# Altium PCB BUSBAR_18650_12S.PcbDoc (part 2 of 2)
Units mm, origin at the board's own origin, x right, y up, seen from the top; angles counter-clockwise.
Board outline 250.7 x 47.4 mm, 2 copper layers (Top Layer, Bottom Layer), stack 1.571 mm thick; 467 components, 25 nets, 999 pads, 401 vias.
Unrouted connection lines stored in the file: 23.
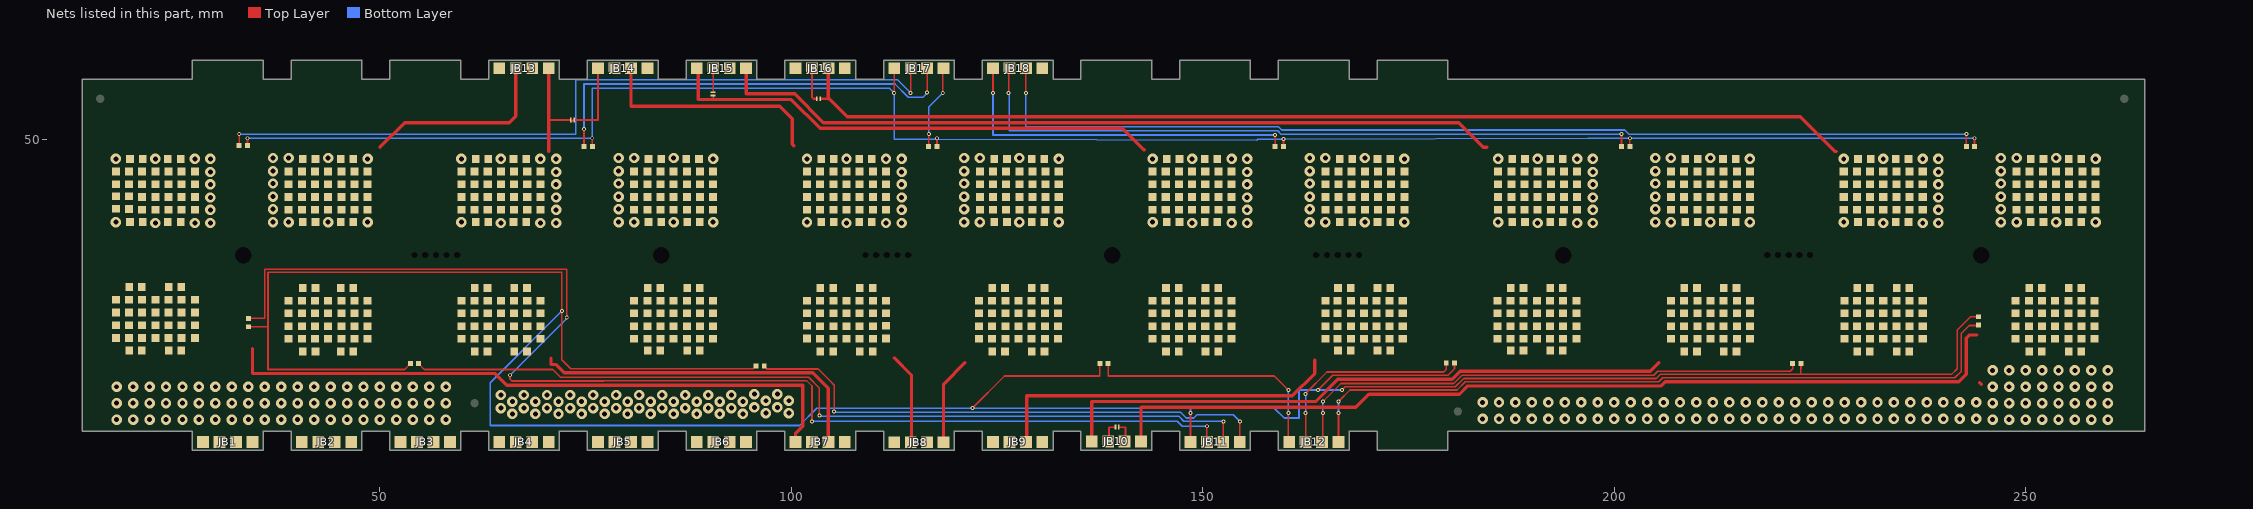
[diagram p2: the nets of this part, all layers, seen from the top]

## Part data
JB1 JB2 JB3 JB4 JB5 JB6 JB7 JB8 JB9 JB10 JB11 JB12 JB13 JB14 JB15 JB16 JB17 JB18: "Battery Spring x4"
NT_3_4 NT_8_9 NT_13_14 NT_13_14_2: library part NET_TIE, "R - Net Tie"
RC_0 RC_1 RC_2 RC_3 RC_4 RC_5 RC_6 RC_7 RC_8 RC_9 RC_10 RC_11 RC_12 RC_13 RC_14 RC_15 RC_16 RC_17 RC_18 RC_19 RC_20 RC_21 RC_22 RC_23 RC_24 RC_25 RC_26 RC_27 RC_28 RC_29 RC_30 RC_31 RC_32 RC_33 RC_34 RC_35 RC_36 RC_37 RC_38 RC_39 RC_40 RC_41 RC_42 RC_43 RC_44 RC_45 RC_46 RC_47 RC_48 RC_49 RC_50 RC_51 RC_52 RC_53 RC_54 RC_55 RC_56 RC_57 RC_58 RC_59 RC_60 RC_61 RC_62 RC_63 RC_64 RC_65 RC_66 RC_67 RC_68 RC_69 RC_70 RC_71 RC_72 RC_73 RC_74 RC_75 RC_76 RC_77 RC_78 RC_79 RC_80 RC_81 RC_82 RC_83 RC_84 RC_85 RC_86 RC_87 RC_88 RC_89 RC_90 RC_91 RC_92 RC_93 RC_94 RC_95 RC_96 RC_97 RC_98 RC_99 RC_100 RC_101 RC_102 RC_103 RC_104 RC_105 RC_106 RC_107 RC_108 RC_109 RC_110 RC_111 RC_112 RC_113 RC_114 RC_115 RC_116 RC_117 RC_118 RC_119 RC_120 RC_121 RC_122 RC_123 RC_124 RC_125 RC_126 RC_127 RC_128 RC_129 RC_130 RC_131 RC_132 RC_133 RC_134 RC_135 RC_136 RC_137 RC_138 RC_139 RC_140 RC_141 RC_142 RC_143 RC_144 RC_145 RC_146 RC_147 RC_148 RC_149 RC_150 RC_151 RC_152 RC_153 RC_154 RC_155 RC_156 RC_157 RC_158 RC_159 RC_160 RC_161 RC_162 RC_163 RC_164 RC_165 RC_166 RC_167 RC_168 RC_169 RC_170 RC_171 RC_172 RC_173 RC_174 RC_175 RC_176 RC_177 RC_178 RC_179 RC_180 RC_181 RC_182 RC_183 RC_184 RC_185 RC_186 RC_187 RC_188 RC_189 RC_190 RC_191 RC_192 RC_193 RC_194 RC_195 RC_196 RC_197 RC_198 RC_199 RC_200 RC_201 RC_202 RC_203 RC_204 RC_205 RC_206 RC_207 RC_208 RC_209 RC_210 RC_211 RC_212 RC_213 RC_214 RC_215 RC_216 RC_217 RC_218 RC_219 RC_220 RC_221 RC_222 RC_223 RC_224 RC_225 RC_226 RC_227 RC_228 RC_229 RC_230 RC_231 RC_232 RC_233 RC_234 RC_235 RC_236 RC_237 RC_238 RC_239 RC_240 RC_241 RC_242 RC_243 RC_244 RC_245 RC_246 RC_247 RC_248 RC_249 RC_250 RC_251 RC_252 RC_253 RC_254 RC_255 RC_256 RC_257 RC_258 RC_259 RC_260 RC_261 RC_262 RC_263 RC_264 RC_265 RC_266 RC_267 RC_268 RC_269 RC_270 RC_271 RC_272 RC_273 RC_274 RC_275 RC_276 RC_277 RC_278 RC_279 RC_280 RC_281 RC_282 RC_283 RC_284 RC_285 RC_286 RC_287 RC_288 RC_289 RC_290 RC_291 RC_292 RC_293 RC_294 RC_295 RC_296 RC_297 RC_298 RC_299 RC_300 RC_301 RC_302 RC_303 RC_304 RC_305 RC_306 RC_307 RC_308 RC_309 RC_310 RC_311 RC_312 RC_313 RC_314 RC_315 RC_316 RC_317 RC_318 RC_319 RC_320 RC_321 RC_322 RC_323 RC_324 RC_325 RC_326 RC_327 RC_328 RC_329 RC_330 RC_331 RC_332 RC_333 RC_334 RC_335 RC_336 RC_337 RC_338 RC_339 RC_340 RC_341 RC_342 RC_343 RC_344 RC_345 RC_346 RC_347 RC_348 RC_349 RC_350 RC_351 RC_352 RC_353 RC_354 RC_355 RC_356 RC_357 RC_358 RC_359 RC_360 RC_361 RC_362 RC_363 RC_364 RC_365 RC_366 RC_367 RC_368 RC_369 RC_370 RC_371 RC_372 RC_373 RC_374 RC_375 RC_376 RC_377 RC_378 RC_379 RC_380 RC_381 RC_382 RC_383 RC_384 RC_385 RC_386 RC_387 RC_388 RC_389 RC_390 RC_391 RC_392 RC_393 RC_394 RC_395 RC_396 RC_397 RC_398 RC_399 RC_400 RC_401 RC_402 RC_403 RC_404 RC_405 RC_406 RC_407 RC_408 RC_409 RC_410 RC_411 RC_412 RC_413 RC_414 RC_415 RC_416 RC_417 RC_418 RC_419 RC_420 RC_421 RC_422 RC_423 RC_424 RC_425 RC_426 RC_427 RC_428 RC_429 RC_430 RC_431: "R - RESISTOR - SMD - 0R - 1% - 0603", JLC Availability=Basic, LCSC Part #=C21189
TSB_1 TSB_1-2 TSB_2_3 TSB_3-4 TSB_4_5 TSB_5-6 TSB_6_7 TSB_7-8 TSB_8_9 TSB_9-10 TSB_10_11 TSB_11-12 TSB_12: "RT - NTC THERMISTOR - 10k - 1% - 0402", JLC Availability=Extended, LCSC Part #=C77131, Value2=3380k

## Free pads (board coordinates)
  round 0 hole 0.762 unplated: 1(54.2,36) 1(55.5,36) 1(56.8,36) 1(58.1,36) 1(59.4,36) 1(109,36) 1(110.3,36) 1(111.6,36) 1(112.9,36) 1(114.2,36) 1(163.8,36) 1(165.1,36) 1(166.4,36) 1(167.7,36) 1(169,36) 1(218.6,36) 1(219.9,36) 1(221.2,36) 1(222.5,36) 1(223.8,36)
  round 1 smd mask+0.5: F(16,55) F(61.5,18) F(181,17) F(262,55)
  round 0 hole 2 slot 42 at 0 deg unplated: M(33.4,36) M(244.6,36)
  round 0 hole 2 slot 50 at 0 deg unplated: M(84.2,36) M(139,36) M(193.8,36)

## Via types
v1: diameter 1.27, hole 0.6, Top Layer to Bottom Layer, tented both sides, 361 vias
v2: diameter 0.48, hole 0.254, Top Layer to Bottom Layer, tented both sides, 40 vias

## Nets (pads, with @x,y where several pads share a name; then routed paths per layer and width w, separated by ;. In a path a pad name is that pad's centre, name@x,y a point inside that pad or via, vN(x,y) a via of type N, cw(c..) or ccw(c..) an arc to the next point about the centre after c; other vN are vias at no path point)
BATT_1: JB1.1 JB1.2 JB1.3 JB1.4 JB2.1 JB2.2 JB2.3 JB2.4 JB3.1 JB3.2 JB3.3 JB3.4 JB7.1 JB13.4 RC_0.1 RC_0.2 RC_1.1 RC_1.2 RC_2.1 RC_2.2 RC_3.1 RC_3.2 RC_4.1 RC_4.2 RC_5.1 RC_5.2 RC_6.1 RC_6.2 RC_7.1 RC_7.2 RC_8.1 RC_8.2 RC_9.1 RC_9.2 RC_10.1 RC_10.2 RC_11.1 RC_11.2 RC_12.1 RC_12.2 RC_13.1 RC_13.2 RC_14.1 RC_14.2 RC_15.1 RC_15.2 RC_16.1 RC_16.2 RC_17.1 RC_17.2 | length 78.3
  Top Layer w0.4: 34.5,24.65 34.5,21.6 64,21.6 65.4,20.2 101.4,20.2 101.4,15.2 100.5,14.3 JB7.1@100.5,13.6 ; JB7.1@100.3,13.4 JB7.1@100.5,13.6 ; JB7.1@100.5,13.1 JB7.1@100.5,13.6
  other v1: 18,16 20,16 22,16 24,16 26,16 28,16 30,16 32,16 34,16 36,16 38,16 40,16 42,16 44,16 46,16 48,16 50,16 52,16 54,16 56,16 58,16 18,18 20,18 22,18 24,18 26,18 28,18 30,18 32,18 34,18 36,18 38,18 40,18 42,18 44,18 46,18 48,18 50,18 52,18 54,18 56,18 58,18 18,20 20,20 22,20 24,20 26,20 28,20 30,20 32,20 34,20 36,20 38,20 40,20 42,20 44,20 46,20 48,20 50,20 52,20 54,20 56,20 58,20
BATT_1-2: JB7.2 JB13.3 RC_18.1 RC_18.2 RC_19.1 RC_19.2 RC_20.1 RC_20.2 RC_21.1 RC_21.2 RC_22.1 RC_22.2 RC_23.1 RC_23.2 RC_24.1 RC_24.2 RC_25.1 RC_25.2 RC_26.1 RC_26.2 RC_27.1 RC_27.2 RC_28.1 RC_28.2 RC_29.1 RC_29.2 RC_30.1 RC_30.2 RC_31.1 RC_31.2 RC_32.1 RC_32.2 RC_33.1 RC_33.2 RC_34.1 RC_34.2 RC_35.1 RC_35.2 RC_36.1 RC_36.2 RC_37.1 RC_37.2 RC_38.1 RC_38.2 RC_39.1 RC_39.2 RC_40.1 RC_40.2 RC_41.1 RC_41.2 RC_42.1 RC_42.2 RC_43.1 RC_43.2 RC_44.1 RC_44.2 RC_45.1 RC_45.2 RC_46.1 RC_46.2 RC_47.1 RC_47.2 RC_48.1 RC_48.2 RC_49.1 RC_49.2 RC_50.1 RC_50.2 RC_51.1 RC_51.2 RC_52.1 RC_52.2 RC_53.1 RC_53.2 | length 27.6
  Top Layer w0.4: 50,49.1 53,52.1 ; 50.1,49.2 53,52.1 ; JB13.3@66.4,58.3 66.5,58.2 66.5,52.9 65.7,52.1 53,52.1
  other v1: 22.7,39.9 27.5,39.9 29.4,39.9 17.9,40 37,40 38.9,40 43.7,40 48.5,40 29.4,41.5 37,41.6 29.4,43 37,43.1 29.4,44.6 37,44.7 29.4,46.1 37,46.2 17.9,47.7 22.7,47.7 27.5,47.7 29.4,47.7 48.5,47.7 37,47.8 38.9,47.8 43.7,47.8
BATT_2-3: JB7.3 JB13.2 RC_54.1 RC_54.2 RC_55.1 RC_55.2 RC_56.1 RC_56.2 RC_57.1 RC_57.2 RC_58.1 RC_58.2 RC_59.1 RC_59.2 RC_60.1 RC_60.2 RC_61.1 RC_61.2 RC_62.1 RC_62.2 RC_63.1 RC_63.2 RC_64.1 RC_64.2 RC_65.1 RC_65.2 RC_66.1 RC_66.2 RC_67.1 RC_67.2 RC_68.1 RC_68.2 RC_69.1 RC_69.2 RC_70.1 RC_70.2 RC_71.1 RC_71.2 RC_72.1 RC_72.2 RC_73.1 RC_73.2 RC_74.1 RC_74.2 RC_75.1 RC_75.2 RC_76.1 RC_76.2 RC_77.1 RC_77.2 RC_78.1 RC_78.2 RC_79.1 RC_79.2 RC_80.1 RC_80.2 RC_81.1 RC_81.2 RC_82.1 RC_82.2 RC_83.1 RC_83.2 RC_84.1 RC_84.2 RC_85.1 RC_85.2 RC_86.1 RC_86.2 RC_87.1 RC_87.2 RC_88.1 RC_88.2 RC_89.1 RC_89.2 | length 43.9
  Top Layer w0.4: 70.8,23.45 70.8,22.7 71.4,22.7 72.4,21.7 102.6,21.7 103.65,20.65 ; 103.4,20.9 104.5,19.8 104.5,18.4 ; JB7.3@104.5,13 104.5,19.5
BATT_3-4: JB7.4 JB13.1 NT_3_4.2 RC_90.1 RC_90.2 RC_91.1 RC_91.2 RC_92.1 RC_92.2 RC_93.1 RC_93.2 RC_94.1 RC_94.2 RC_95.1 RC_95.2 RC_96.1 RC_96.2 RC_97.1 RC_97.2 RC_98.1 RC_98.2 RC_99.1 RC_99.2 RC_100.1 RC_100.2 RC_101.1 RC_101.2 RC_102.1 RC_102.2 RC_103.1 RC_103.2 RC_104.1 RC_104.2 RC_105.1 RC_105.2 RC_106.1 RC_106.2 RC_107.1 RC_107.2 RC_108.1 RC_108.2 RC_109.1 RC_109.2 RC_110.1 RC_110.2 RC_111.1 RC_111.2 RC_112.1 RC_112.2 RC_113.1 RC_113.2 RC_114.1 RC_114.2 RC_115.1 RC_115.2 RC_116.1 RC_116.2 RC_117.1 RC_117.2 RC_118.1 RC_118.2 RC_119.1 RC_119.2 RC_120.1 RC_120.2 RC_121.1 RC_121.2 RC_122.1 RC_122.2 RC_123.1 RC_123.2 RC_124.1 RC_124.2 RC_125.1 RC_125.2 | length 12.7
  Top Layer w0.25: 70.6,52.4 NT_3_4.2@73.2,52.4
  Top Layer w0.4: JB13.1@70.4,58.7 70.5,58.6 70.5,48.6
  other v1: 64.7,39.9 69.5,39.9 71.4,39.9 59.9,40 79,40 80.9,40 85.7,40 90.5,40 71.4,41.5 79,41.6 71.4,43 79,43.1 71.4,44.6 79,44.7 71.4,46.1 79,46.2 59.9,47.7 64.7,47.7 69.5,47.7 71.4,47.7 90.5,47.7 79,47.8 80.9,47.8 85.7,47.8
BATT_4-5: JB8.2 JB14.3 RC_126.1 RC_126.2 RC_127.1 RC_127.2 RC_128.1 RC_128.2 RC_129.1 RC_129.2 RC_130.1 RC_130.2 RC_131.1 RC_131.2 RC_132.1 RC_132.2 RC_133.1 RC_133.2 RC_134.1 RC_134.2 RC_135.1 RC_135.2 RC_136.1 RC_136.2 RC_137.1 RC_137.2 RC_138.1 RC_138.2 RC_139.1 RC_139.2 RC_140.1 RC_140.2 RC_141.1 RC_141.2 RC_142.1 RC_142.2 RC_143.1 RC_143.2 RC_144.1 RC_144.2 RC_145.1 RC_145.2 RC_146.1 RC_146.2 RC_147.1 RC_147.2 RC_148.1 RC_148.2 RC_149.1 RC_149.2 RC_150.1 RC_150.2 RC_151.1 RC_151.2 RC_152.1 RC_152.2 RC_153.1 RC_153.2 RC_154.1 RC_154.2 RC_155.1 RC_155.2 RC_156.1 RC_156.2 RC_157.1 RC_157.2 RC_158.1 RC_158.2 RC_159.1 RC_159.2 RC_160.1 RC_160.2 RC_161.1 RC_161.2 | length 11.6
  Top Layer w0.4: 112.5,23.5 114.6,21.4 JB8.2@114.6,12.8
BATT_5-6: JB8.3 JB14.2 RC_162.1 RC_162.2 RC_163.1 RC_163.2 RC_164.1 RC_164.2 RC_165.1 RC_165.2 RC_166.1 RC_166.2 RC_167.1 RC_167.2 RC_168.1 RC_168.2 RC_169.1 RC_169.2 RC_170.1 RC_170.2 RC_171.1 RC_171.2 RC_172.1 RC_172.2 RC_173.1 RC_173.2 RC_174.1 RC_174.2 RC_175.1 RC_175.2 RC_176.1 RC_176.2 RC_177.1 RC_177.2 RC_178.1 RC_178.2 RC_179.1 RC_179.2 RC_180.1 RC_180.2 RC_181.1 RC_181.2 RC_182.1 RC_182.2 RC_183.1 RC_183.2 RC_184.1 RC_184.2 RC_185.1 RC_185.2 RC_186.1 RC_186.2 RC_187.1 RC_187.2 RC_188.1 RC_188.2 RC_189.1 RC_189.2 RC_190.1 RC_190.2 RC_191.1 RC_191.2 RC_192.1 RC_192.2 RC_193.1 RC_193.2 RC_194.1 RC_194.2 RC_195.1 RC_195.2 RC_196.1 RC_196.2 RC_197.1 RC_197.2 | length 28.1
  Top Layer w0.4: JB14.2@80.4,58.6 80.5,58.5 80.5,54.1 98.6,54.1 100.1,52.6 100.1,49.5 100.3,49.3
  other v1: 106.7,39.9 111.5,39.9 113.4,39.9 101.9,40 121,40 122.9,40 127.7,40 132.5,40 113.4,41.5 121,41.6 113.4,43 121,43.1 113.4,44.6 121,44.7 113.4,46.1 121,46.2 101.9,47.7 106.7,47.7 111.5,47.7 113.4,47.7 132.5,47.7 121,47.8 122.9,47.8 127.7,47.8
BATT_6-7: JB8.4 JB14.1 RC_198.1 RC_198.2 RC_199.1 RC_199.2 RC_200.1 RC_200.2 RC_201.1 RC_201.2 RC_202.1 RC_202.2 RC_203.1 RC_203.2 RC_204.1 RC_204.2 RC_205.1 RC_205.2 RC_206.1 RC_206.2 RC_207.1 RC_207.2 RC_208.1 RC_208.2 RC_209.1 RC_209.2 RC_210.1 RC_210.2 RC_211.1 RC_211.2 RC_212.1 RC_212.2 RC_213.1 RC_213.2 RC_214.1 RC_214.2 RC_215.1 RC_215.2 RC_216.1 RC_216.2 RC_217.1 RC_217.2 RC_218.1 RC_218.2 RC_219.1 RC_219.2 RC_220.1 RC_220.2 RC_221.1 RC_221.2 RC_222.1 RC_222.2 RC_223.1 RC_223.2 RC_224.1 RC_224.2 RC_225.1 RC_225.2 RC_226.1 RC_226.2 RC_227.1 RC_227.2 RC_228.1 RC_228.2 RC_229.1 RC_229.2 RC_230.1 RC_230.2 RC_231.1 RC_231.2 RC_232.1 RC_232.2 RC_233.1 RC_233.2 | length 11
  Top Layer w0.4: JB8.4@118.5,13.55 118.5,18.8 ; 118.5,18.2 118.5,20.3 121.1,22.9
BATT_7-8: JB9.1 JB15.4 NT_8_9.1 RC_234.1 RC_234.2 RC_235.1 RC_235.2 RC_236.1 RC_236.2 RC_237.1 RC_237.2 RC_238.1 RC_238.2 RC_239.1 RC_239.2 RC_240.1 RC_240.2 RC_241.1 RC_241.2 RC_242.1 RC_242.2 RC_243.1 RC_243.2 RC_244.1 RC_244.2 RC_245.1 RC_245.2 RC_246.1 RC_246.2 RC_247.1 RC_247.2 RC_248.1 RC_248.2 RC_249.1 RC_249.2 RC_250.1 RC_250.2 RC_251.1 RC_251.2 RC_252.1 RC_252.2 RC_253.1 RC_253.2 RC_254.1 RC_254.2 RC_255.1 RC_255.2 RC_256.1 RC_256.2 RC_257.1 RC_257.2 RC_258.1 RC_258.2 RC_259.1 RC_259.2 RC_260.1 RC_260.2 RC_261.1 RC_261.2 RC_262.1 RC_262.2 RC_263.1 RC_263.2 RC_264.1 RC_264.2 RC_265.1 RC_265.2 RC_266.1 RC_266.2 RC_267.1 RC_267.2 RC_268.1 RC_268.2 RC_269.1 RC_269.2 | length 60.9
  Top Layer w0.2: 90.5,55 NT_8_9.1@90.5,55.4
  Top Layer w0.4: JB15.4@88.5,58.6 88.7,58.4 88.7,54.9 100,54.9 103.5,51.4 140.2,51.4 142.8,48.8 142.9,48.8
  other v1: 148.7,39.9 153.5,39.9 155.4,39.9 143.9,40 163,40 164.9,40 169.7,40 174.5,40 155.4,41.5 163,41.6 155.4,43 163,43.1 155.4,44.6 163,44.7 155.4,46.1 163,46.2 143.9,47.7 148.7,47.7 153.5,47.7 155.4,47.7 174.5,47.7 163,47.8 164.9,47.8 169.7,47.8
BATT_8-9: JB9.3 JB15.2 RC_270.1 RC_270.2 RC_271.1 RC_271.2 RC_272.1 RC_272.2 RC_273.1 RC_273.2 RC_274.1 RC_274.2 RC_275.1 RC_275.2 RC_276.1 RC_276.2 RC_277.1 RC_277.2 RC_278.1 RC_278.2 RC_279.1 RC_279.2 RC_280.1 RC_280.2 RC_281.1 RC_281.2 RC_282.1 RC_282.2 RC_283.1 RC_283.2 RC_284.1 RC_284.2 RC_285.1 RC_285.2 RC_286.1 RC_286.2 RC_287.1 RC_287.2 RC_288.1 RC_288.2 RC_289.1 RC_289.2 RC_290.1 RC_290.2 RC_291.1 RC_291.2 RC_292.1 RC_292.2 RC_293.1 RC_293.2 RC_294.1 RC_294.2 RC_295.1 RC_295.2 RC_296.1 RC_296.2 RC_297.1 RC_297.2 RC_298.1 RC_298.2 RC_299.1 RC_299.2 RC_300.1 RC_300.2 RC_301.1 RC_301.2 RC_302.1 RC_302.2 RC_303.1 RC_303.2 RC_304.1 RC_304.2 RC_305.1 RC_305.2 | length 43.7
  Top Layer w0.4: JB9.3@128.6,13 128.6,18.9 160.9,18.9 163.6,21.6 163.6,23.25
BATT_9-10: JB9.4 JB15.1 RC_306.1 RC_306.2 RC_307.1 RC_307.2 RC_308.1 RC_308.2 RC_309.1 RC_309.2 RC_310.1 RC_310.2 RC_311.1 RC_311.2 RC_312.1 RC_312.2 RC_313.1 RC_313.2 RC_314.1 RC_314.2 RC_315.1 RC_315.2 RC_316.1 RC_316.2 RC_317.1 RC_317.2 RC_318.1 RC_318.2 RC_319.1 RC_319.2 RC_320.1 RC_320.2 RC_321.1 RC_321.2 RC_322.1 RC_322.2 RC_323.1 RC_323.2 RC_324.1 RC_324.2 RC_325.1 RC_325.2 RC_326.1 RC_326.2 RC_327.1 RC_327.2 RC_328.1 RC_328.2 RC_329.1 RC_329.2 RC_330.1 RC_330.2 RC_331.1 RC_331.2 RC_332.1 RC_332.2 RC_333.1 RC_333.2 RC_334.1 RC_334.2 RC_335.1 RC_335.2 RC_336.1 RC_336.2 RC_337.1 RC_337.2 RC_338.1 RC_338.2 RC_339.1 RC_339.2 RC_340.1 RC_340.2 RC_341.1 RC_341.2 | length 99.4
  Top Layer w0.4: JB15.1@94.4,58.2 94.5,58.1 94.5,55.6 97.2,55.6 ; 96.5,55.6 100.4,55.6 103.9,52.1 181.1,52.1 181.4,51.8 ; 183.8,49.4 181.4,51.8 ; 184.5,49.1 184.1,49.1 181.4,51.8
  other v1: 190.7,39.9 195.5,39.9 197.4,39.9 185.9,40 205,40 206.9,40 211.7,40 216.5,40 197.4,41.5 205,41.6 197.4,43 205,43.1 197.4,44.6 205,44.7 197.4,46.1 205,46.2 185.9,47.7 190.7,47.7 195.5,47.7 197.4,47.7 216.5,47.7 205,47.8 206.9,47.8 211.7,47.8
BATT_10-11: JB10.1 JB16.4 RC_342.1 RC_342.2 RC_343.1 RC_343.2 RC_344.1 RC_344.2 RC_345.1 RC_345.2 RC_346.1 RC_346.2 RC_347.1 RC_347.2 RC_348.1 RC_348.2 RC_349.1 RC_349.2 RC_350.1 RC_350.2 RC_351.1 RC_351.2 RC_352.1 RC_352.2 RC_353.1 RC_353.2 RC_354.1 RC_354.2 RC_355.1 RC_355.2 RC_356.1 RC_356.2 RC_357.1 RC_357.2 RC_358.1 RC_358.2 RC_359.1 RC_359.2 RC_360.1 RC_360.2 RC_361.1 RC_361.2 RC_362.1 RC_362.2 RC_363.1 RC_363.2 RC_364.1 RC_364.2 RC_365.1 RC_365.2 RC_366.1 RC_366.2 RC_367.1 RC_367.2 RC_368.1 RC_368.2 RC_369.1 RC_369.2 RC_370.1 RC_370.2 RC_371.1 RC_371.2 RC_372.1 RC_372.2 RC_373.1 RC_373.2 RC_374.1 RC_374.2 RC_375.1 RC_375.2 RC_376.1 RC_376.2 RC_377.1 RC_377.2 | length 76
  Top Layer w0.4: JB10.1@136.5,13.2 JB10.1@136.5,13.7 ; JB10.1@136.6,13.6 JB10.1@136.5,13.7 ; 205.4,22.9 204.4,21.9 181.3,21.9 180.3,20.9 166.4,20.9 163.7,18.2 136.5,18.2 JB10.1@136.5,13.7
BATT_11-12: JB10.3 JB16.2 NT_13_14.2 NT_13_14_2.2 RC_378.1 RC_378.2 RC_379.1 RC_379.2 RC_380.1 RC_380.2 RC_381.1 RC_381.2 RC_382.1 RC_382.2 RC_383.1 RC_383.2 RC_384.1 RC_384.2 RC_385.1 RC_385.2 RC_386.1 RC_386.2 RC_387.1 RC_387.2 RC_388.1 RC_388.2 RC_389.1 RC_389.2 RC_390.1 RC_390.2 RC_391.1 RC_391.2 RC_392.1 RC_392.2 RC_393.1 RC_393.2 RC_394.1 RC_394.2 RC_395.1 RC_395.2 RC_396.1 RC_396.2 RC_397.1 RC_397.2 RC_398.1 RC_398.2 RC_399.1 RC_399.2 RC_400.1 RC_400.2 RC_401.1 RC_401.2 RC_402.1 RC_402.2 RC_403.1 RC_403.2 RC_404.1 RC_404.2 RC_405.1 RC_405.2 RC_406.1 RC_406.2 RC_407.1 RC_407.2 RC_408.1 RC_408.2 RC_409.1 RC_409.2 RC_410.1 RC_410.2 RC_411.1 RC_411.2 RC_412.1 RC_412.2 RC_413.1 RC_413.2 | length 132.4
  Top Layer w0.2: 139.9,15.1 140.6,15.1 JB10.3@140.6,13.4
  Top Layer w0.25: 103.6,55 104.4,55 104.5,55.1 104.6,55
  Top Layer w0.4: JB16.2@104.5,58.8 JB16.2@104.5,58.7 104.5,55.1 104.5,55 104.6,55 106.8,52.8 222.6,52.8 226.8,48.6 227,48.6
  other v1: 232.7,39.9 237.5,39.9 239.4,39.9 227.9,40 247,40 248.9,40 253.7,40 258.5,40 239.4,41.5 247,41.6 239.4,43 247,43.1 239.4,44.6 247,44.7 239.4,46.1 247,46.2 227.9,47.7 232.7,47.7 237.5,47.7 239.4,47.7 258.5,47.7 247,47.8 248.9,47.8 253.7,47.8
BATT_12: JB4.1 JB4.2 JB4.3 JB4.4 JB5.1 JB5.2 JB5.3 JB5.4 JB6.1 JB6.2 JB6.3 JB6.4 JB10.4 JB16.1 RC_414.1 RC_414.2 RC_415.1 RC_415.2 RC_416.1 RC_416.2 RC_417.1 RC_417.2 RC_418.1 RC_418.2 RC_419.1 RC_419.2 RC_420.1 RC_420.2 RC_421.1 RC_421.2 RC_422.1 RC_422.2 RC_423.1 RC_423.2 RC_424.1 RC_424.2 RC_425.1 RC_425.2 RC_426.1 RC_426.2 RC_427.1 RC_427.2 RC_428.1 RC_428.2 RC_429.1 RC_429.2 RC_430.1 RC_430.2 RC_431.1 RC_431.2 | length 112.5
  Top Layer w0.4: JB10.4@142.5,13 JB10.4@142.5,13.35 142.5,13.5 142.5,17.5 ; 142.6,17.5 168.6,17.5 170.2,19.1 181.2,19.1 182.2,20.1 205.7,20.1 206.2,20.6 241.9,20.6 242.8,21.5 242.8,25.9 243.2,26.3 244.1,26.3 ; 244.4,20.5 244.6,20.3
  other v1: 246,16 248,16 250,16 252,16 254,16 256,16 258,16 260,16 184,16.1 186,16.1 188,16.1 190,16.1 192,16.1 194,16.1 196,16.1 198,16.1 200,16.1 202,16.1 204,16.1 206,16.1 208,16.1 210,16.1 212,16.1 214,16.1 216,16.1 218,16.1 220,16.1 222,16.1 224,16.1 226,16.1 228,16.1 230,16.1 232,16.1 234,16.1 236,16.1 238,16.1 240,16.1 242,16.1 244,16.1 66.1,16.7 68.9,16.7 71.7,16.7 74.5,16.7 77.3,16.7 80.1,16.7 82.9,16.7 85.7,16.7 88.5,16.7 91.3,16.7 94.1,16.7 96.9,16.8 99.7,16.8 64.7,17.4 67.5,17.4 70.3,17.4 73.1,17.4 75.9,17.4 78.7,17.4 81.5,17.4 84.3,17.4 87.1,17.4 89.9,17.4 92.7,17.4 95.5,17.5 98.3,17.5 246,18 248,18 250,18 252,18 254,18 256,18 258,18 260,18 184,18.1 186,18.1 188,18.1 190,18.1 192,18.1 194,18.1 196,18.1 198,18.1 200,18.1 202,18.1 204,18.1 206,18.1 208,18.1 210,18.1 212,18.1 214,18.1 216,18.1 218,18.1 220,18.1 222,18.1 224,18.1 226,18.1 228,18.1 230,18.1 232,18.1 234,18.1 236,18.1 238,18.1 240,18.1 242,18.1 244,18.1 66.1,18.2 68.9,18.2 71.7,18.2 74.5,18.2 77.3,18.2 80.1,18.2 82.9,18.2 85.7,18.2 88.5,18.2 91.3,18.2 94.1,18.2 96.9,18.3 99.7,18.3 64.7,19 67.5,19 70.3,19 73.1,19 75.9,19 78.7,19 81.5,19 84.3,19 87.1,19 89.9,19 92.7,19 95.5,19.1 98.3,19.1 246,20 246,20 248,20 248,20 250,20 250,20 252,20 252,20 254,20 254,20 256,20 256,20 258,20 258,20 260,20 260,20 246,22 248,22 250,22 252,22 254,22 256,22 258,22 260,22
C4: JB8.1 JB14.4 NT_3_4.1 | length 9.5
  Top Layer w0.2: 73.3,52.2 73.5,52.4
  Top Layer w0.25: 73.5,52.4 NT_3_4.1@73.6,52.4 76.5,52.4 76.5,58.5 JB14.4@76.4,58.6
C9: JB9.2 JB15.3 NT_8_9.2 | length 3
  Top Layer w0.2: JB15.3@90.4,58.8 JB15.3@90.5,58.7 NT_8_9.2@90.5,55.8
C13: JB10.2 JB16.3 NT_13_14.1 NT_13_14_2.1 | length 6.3
  Top Layer w0.2: JB10.2@138.6,13.7 138.6,15.1 NT_13_14_2.1@139.3,15.1
  Top Layer w0.25: JB16.3@102.5,58.7 102.5,55.2 102.7,55 NT_13_14.1@103.1,55
TS_0: JB11.2 JB17.3 TSB_1-2.2 TSB_1.1 | length 247.4
  Top Layer w0.2: TSB_1-2.2@32.892,49.3 v2@32.892,50.6 ; TSB_1.1@34,28.308 35.992,28.308 35.992,34.3 72.7,34.3 v2(72.7,28.4) ; v2(65.8,21.4) 65.8,20.9 66,20.7 77.2,20.7 99.1,20.75 ; 99.2,20.75 101.85,20.75 102.5,20.1 v2@102.5,16 ; JB17.3@114.3,58.1 114.5,57.9 114.5,56.9 v2(114.5,55.7) ; JB11.2@150.5,13.1 JB11.2@150.5,13.3 v2(150.5,15.2)
  Bottom Layer w0.2: v2(32.9,50.7) 73.8,50.7 73.8,57.3 112.9,57.3 v2(114.5,55.7) ; v2(72.7,28.4) 72.7,28.3 v2(65.8,21.4) ; v2(102.5,15.8) 146.9,15.8 147.5,15.2 v2(150.5,15.2) ; 113.05,57.15 v2(114.5,55.7) ; v2@114.5,55.6 v2(114.5,55.7) ; v2(65.8,21.4) 65.75,21.35 65.7,21.4 v2(65.8,21.4)
TS_1: JB11.3 JB17.2 TSB_2_3.2 TSB_3-4.2 | length 158.2
  Top Layer w0.2: TSB_2_3.2@54.8,22.8 54.8,22.7 55.4,22.1 71,22.1 71.95,21.15 78.95,21.15 ; v2@74.7,51.3 74.792,51.208 TSB_3-4.2@74.792,49.3 ; 79.3,21.15 78.95,21.15 ; v2(103.4,16.5) 103.4,19.85 102.1,21.15 78.95,21.15 ; v2@116.5,55.7 JB17.2@116.5,58.1 ; JB11.3@152.5,13.1 JB11.3@152.5,13.3 v2(152.5,15.8)
  Bottom Layer w0.2: v2(74.8,51.3) 74.8,56.8 112.6,56.8 114.2,55.2 116,55.2 v2@116.5,55.7 ; v2(103.4,16.5) 103.5,16.4 147.1,16.4 147.7,15.8 v2(152.5,15.8)
  other v2: 116.5,55.75
TS_2: JB11.4 JB17.1 TSB_4_5.2 TSB_5-6.2 | length 75.7
  Top Layer w0.2: TSB_4_5.2@96.708,22.45 96.708,22.442 97,22.15 103.25,22.15 104.65,20.75 105.2,20.2 v2(105.2,17) ; TSB_5-6.2@116.692,49.3 v2@116.692,50.7 ; v2(118.4,55.7) JB17.1@118.4,58.6 ; JB11.4@154.5,13.1 JB11.4@154.5,13.3 v2(154.5,15.8)
  Bottom Layer w0.2: v2@105.1,17.1 v2(105.2,17) 105.3,16.9 147.3,16.9 148,16.2 148.9,16.2 149.3,16.6 153.7,16.6 v2(154.5,15.8) ; v2(116.7,50.7) 116.7,54 v2(118.4,55.7) v2@118.5,55.7
TS_3: JB12.1 JB18.4 TSB_6_7.2 TSB_7-8.2 | length 74.2
  Top Layer w0.2: v2(124.5,55.7) 124.5,56.9 ; 124.5,56.4 JB18.4@124.5,58.5 ; TSB_6_7.2@138.5,22.8 138.5,21.3 158.7,21.3 v2(160.4,19.6) ; TSB_7-8.2@158.792,49.3 v2@158.792,50.7 ; JB12.1@160.4,13.5 v2@160.4,16.7
  Bottom Layer w0.2: v2(124.5,55.7) 124.5,50.6 v2(158.8,50.6) ; v2(160.4,16.8) v2(160.4,19.6)
TS_4: JB12.2 JB18.3 TSB_8_9.2 TSB_9-10.2 | length 108
  Top Layer w0.2: v2(126.4,55.7) JB18.3@126.4,58.1 ; JB12.2@162.5,13.3 v2(162.5,16.8) ; v2(162.5,19.1) 162.5,19.2 165.1,21.8 179.3,21.8 179.592,22.092 TSB_8_9.2@179.592,22.85 ; TSB_9-10.2@200.892,49.2 v2@200.892,50.7
  Bottom Layer w0.2: v2@126.5,55.7 126.5,51.1 159.1,51.1 159.5,50.7 v2(200.9,50.7) ; v2(162.5,16.8) v2(162.5,19.1)
TS_5: JB12.3 JB18.2 TSB_10_11.2 TSB_11-12.2 | length 187.5
  Top Layer w0.2: v2(128.5,55.7) JB18.2@128.5,58.2 ; JB12.3@164.6,13.3 v2@164.6,16.7 ; TSB_10_11.2@221.692,22.8 221.692,22.192 ; 221.7,22.2 221.692,22.192 ; TSB_11-12.2@242.792,49.2 v2@242.792,50.7 ; v2(164.6,18.2) 166.8,20.4 180.5,20.4 181.5,21.4 204.8,21.4 205.3,21.9 221.4,21.9 221.692,22.192 ; v2(164.6,18.2) 164.5,18.1 164.5,18.3 164.55,18.25 v2(164.6,18.2)
  Bottom Layer w0.2: v2@128.45,55.65 v2(128.5,55.7) 128.5,51.6 159.2,51.6 159.6,51.2 201.3,51.2 201.8,50.7 v2(242.8,50.7) ; v2(164.6,16.8) v2(164.6,18.2)
TS_6: JB12.4 JB18.1 TSB_12.1 | length 88.9
  Top Layer w0.2: JB12.4@166.5,13.4 v2@166.5,16.7 ; v2@166.6,18.3 167.9,19.6 180.9,19.6 181.9,20.6 205.4,20.6 205.9,21.1 241.4,21.1 242.2,21.9 242.2,26.5 243.15,27.45 TSB_12.1@244.3,27.45
  Bottom Layer w0.2: v2(166.5,16.8) v2(166.5,18.2)
TS_A_GND: JB17.4 TSB_1-2.1 TSB_3-4.1 TSB_5-6.1 TSB_7-8.1 TSB_9-10.1 TSB_11-12.1 | length 230.5
  Top Layer w0.2: v2(33.9,50.2) 33.908,50.192 TSB_1-2.1@33.908,49.3 ; TSB_3-4.1@75.808,49.2 v2@75.808,50.192 ; v2(112.5,55.7) JB17.4@112.5,58.1 ; TSB_5-6.1@117.708,49.2 v2@117.708,50.292 ; TSB_7-8.1@159.808,49.2 v2@159.808,50.2 ; v2(201.9,50.2) 201.9,50.1 201.908,50.092 TSB_9-10.1@201.908,49.2 ; TSB_11-12.1@243.792,49.1 v2@243.792,50.2
  Bottom Layer w0.2: v2(33.9,50.2) v2(75.8,50.2) 75.8,56.3 111.9,56.3 v2(112.5,55.7) ; v2@112.5,55.75 v2(112.5,55.7) ; v2@159.9,50.1 v2(159.8,50.1) ; v2(243.8,50.2) v2(201.9,50.2) 196.8,50.2 v2(159.8,50.1) ; v2(112.5,55.7) 112.5,50.115 117.7,50.098 156.572,49.973 156.7,50.1 v2(159.8,50.1)
  other v2: 117.7,50.2
TS_B_GND: JB11.1 TSB_1.2 TSB_2_3.1 TSB_4_5.1 TSB_6_7.1 TSB_8_9.1 TSB_10_11.1 TSB_12.2 | length 355
  Top Layer w0.2: TSB_1.2@34,27.2 34.1,27.3 36.4,27.3 ; TSB_2_3.1@53.6,22.7 53,22.1 36.4,22.1 36.4,27.3 ; TSB_4_5.1@95.692,22.55 95.342,22.2 73.2,22.2 72.1,23.3 v2(72.1,29.2) 72.1,33.9 36.4,33.9 36.4,27.3 ; v2(122,17.4) 125.9,21.3 137.492,21.3 TSB_6_7.1@137.492,22.8 ; JB11.1@148.3,13.6 JB11.1@148.5,13.8 ; JB11.1@148.5,13.3 JB11.1@148.5,13.8 ; v2(148.5,16.8) JB11.1@148.5,13.8 ; v2(164,19.6) 163.9,19.5 165.8,21.4 179.8,21.4 180.6,22.2 TSB_8_9.1@180.6,23 ; v2@166.7,19.6 v2(166.9,19.6) 167.3,20 180.7,20 181.7,21 205.1,21 205.6,21.5 222.695,21.5 ; TSB_10_11.1@222.708,22.75 222.695,21.5 ; TSB_12.2@244.3,28.5 243.3,28.5 241.7,26.9 241.7,22.2 241,21.5 222.695,21.5
  Bottom Layer w0.2: v2(72.1,29.2) 63.4,20.5 63.4,15.3 101,15.3 103.1,17.4 v2(122,17.4) 148.5,17.4 ; v2(148.5,16.8) 148.5,17.4 ; v2(166.9,19.6) v2(164,19.6) 161.7,19.6 161.7,16.2 159.9,16.2 158.7,17.4 148.5,17.4

## Other copper
Top Layer:
  drawing of 598 lines, arcs and shapes, not listed
Bottom Layer:
  region net BATT_12: 92,15.8 92,20.4 63.9,20.4 63.9,15.8
  rectangle net BATT_12: 108,17.8 118.8,24.35
  rectangle net BATT_12: 114.6,17.8 159.6,23.6
  rectangle net BATT_12: 109,31.95 114.9,34
  rectangle net BATT_12: 89,17.8 119.4,34
  rectangle net BATT_12: 168,15.1 263.6,27.95
  rectangle net BATT_12: 118.7,20 263.6,34
  rectangle net BATT_12: 73.3,15.8 101,34
  rectangle net BATT_11-12: 225.8,38 260.6,49.7
  rectangle net BATT_9-10: 183.6,38 218.4,49.7
  rectangle net BATT_7-8: 141.9,38 176.7,49.7
  rectangle net BATT_5-6: 99.9,38 134.7,49.7
  rectangle net BATT_3-4: 57.9,38 92.7,49.7
  rectangle net BATT_1-2: 15.8,38 50.6,49.7
  region net BATT_12: 64.9,19.6 73.3,28 76.6,28 76.6,19.6
  region net TS_4: 179,17.1
  region net BATT_12: 169.9,17.7 244,17.7 244,22.45 244,23.35 169.9,23.35
  region net BATT_1: 59.4,15 59.4,34 34.15,34 15.8,34 15.8,15

## Silkscreen, mask and mechanical layers (free items; w line width, h text height)
Top Overlay:
  lines w0.1: 13.8,14.6 27.2,14.6 27.2,12.3 35.8,12.3 35.8,14.6 39.2,14.6 39.2,12.3 47.8,12.3 47.8,14.6 51.2,14.6 51.2,12.3 59.8,12.3 59.8,14.6 63.2,14.6 63.2,12.3 71.8,12.3 71.8,14.6 75.2,14.6 75.2,12.3 83.8,12.3 83.8,14.6 87.2,14.6 87.2,12.3 95.8,12.3 95.8,14.6 99.2,14.6 99.2,12.3 107.8,12.3 107.8,14.6 111.2,14.6 111.2,12.3 119.8,12.3 119.8,14.6 123.2,14.6 123.2,12.3 131.8,12.3 131.8,14.6 135.2,14.6 135.2,12.3 143.8,12.3 143.8,14.6 147.2,14.6 147.2,12.3 155.8,12.3 155.8,14.6 159.2,14.6 159.2,12.3 167.8,12.3 167.8,14.6 171.2,14.6 171.2,12.3 179.8,12.3 179.8,14.6 264.5,14.6 264.5,57.4 179.8,57.4 179.8,59.7 171.2,59.7 171.2,57.4 167.8,57.4 167.8,59.7 159.2,59.7 159.2,57.4 155.8,57.4 155.8,59.7 147.2,59.7 147.2,57.4 143.8,57.4 143.8,59.7 135.2,59.7 135.2,57.4 131.8,57.4 131.8,59.7 123.2,59.7 123.2,57.4 119.8,57.4 119.8,59.7 111.2,59.7 111.2,57.4 107.8,57.4 107.8,59.7 99.2,59.7 99.2,57.4 95.8,57.4 95.8,59.7 87.2,59.7 87.2,57.4 83.8,57.4 83.8,59.7 75.2,59.7 75.2,57.4 71.8,57.4 71.8,59.7 63.2,59.7 63.2,57.4 59.8,57.4 59.8,59.7 51.2,59.7 51.2,57.4 47.8,57.4 47.8,59.7 39.2,59.7 39.2,57.4 35.8,57.4 35.8,59.7 27.2,59.7 27.2,57.4 13.8,57.4 13.8,35 13.8,14.6 ; 272.4,36.1 272.4,36.1
  text "JLCJLCJLCJLC" at 20.2,51.7 h1.52
Bottom Overlay:
  lines w0.1: 13.8,14.6 27.2,14.6 27.2,12.3 35.8,12.3 35.8,14.6 39.2,14.6 39.2,12.3 47.8,12.3 47.8,14.6 51.2,14.6 51.2,12.3 59.8,12.3 59.8,14.6 63.2,14.6 63.2,12.3 71.8,12.3 71.8,14.6 75.2,14.6 75.2,12.3 83.8,12.3 83.8,14.6 87.2,14.6 87.2,12.3 95.8,12.3 95.8,14.6 99.2,14.6 99.2,12.3 107.8,12.3 107.8,14.6 111.2,14.6 111.2,12.3 119.8,12.3 119.8,14.6 123.2,14.6 123.2,12.3 131.8,12.3 131.8,14.6 135.2,14.6 135.2,12.3 143.8,12.3 143.8,14.6 147.2,14.6 147.2,12.3 155.8,12.3 155.8,14.6 159.2,14.6 159.2,12.3 167.8,12.3 167.8,14.6 171.2,14.6 171.2,12.3 179.8,12.3 179.8,14.6 264.5,14.6 264.5,34.7 264.5,35 13.8,35 13.8,14.6 ; 13.8,37 264.5,37 264.5,57.4 179.8,57.4 179.8,59.7 171.2,59.7 171.2,57.4 167.8,57.4 167.8,59.7 159.2,59.7 159.2,57.4 155.8,57.4 155.8,59.7 147.2,59.7 147.2,57.4 143.8,57.4 143.8,59.7 135.2,59.7 135.2,57.4 131.8,57.4 131.8,59.7 123.2,59.7 123.2,57.4 119.8,57.4 119.8,59.7 111.2,59.7 111.2,57.4 107.8,57.4 107.8,59.7 99.2,59.7 99.2,57.4 95.8,57.4 95.8,59.7 87.2,59.7 87.2,57.4 83.8,57.4 83.8,59.7 75.2,59.7 75.2,57.4 71.8,57.4 71.8,59.7 63.2,59.7 63.2,57.4 59.8,57.4 59.8,59.7 51.2,59.7 51.2,57.4 47.8,57.4 47.8,59.7 39.2,59.7 39.2,57.4 35.8,57.4 35.8,59.7 27.2,59.7 27.2,57.4 13.8,57.4 13.8,37